# Altium PCB PCB1-B-EVT2.PcbDoc (part 2 of 2)
Units mil, origin at the board's own origin, x right, y up, seen from the top; angles counter-clockwise.
Board outline 2476 x 3729 mil, 2 copper layers (Top Layer, Bottom Layer); 100 components, 79 nets, 360 pads, 170 vias.
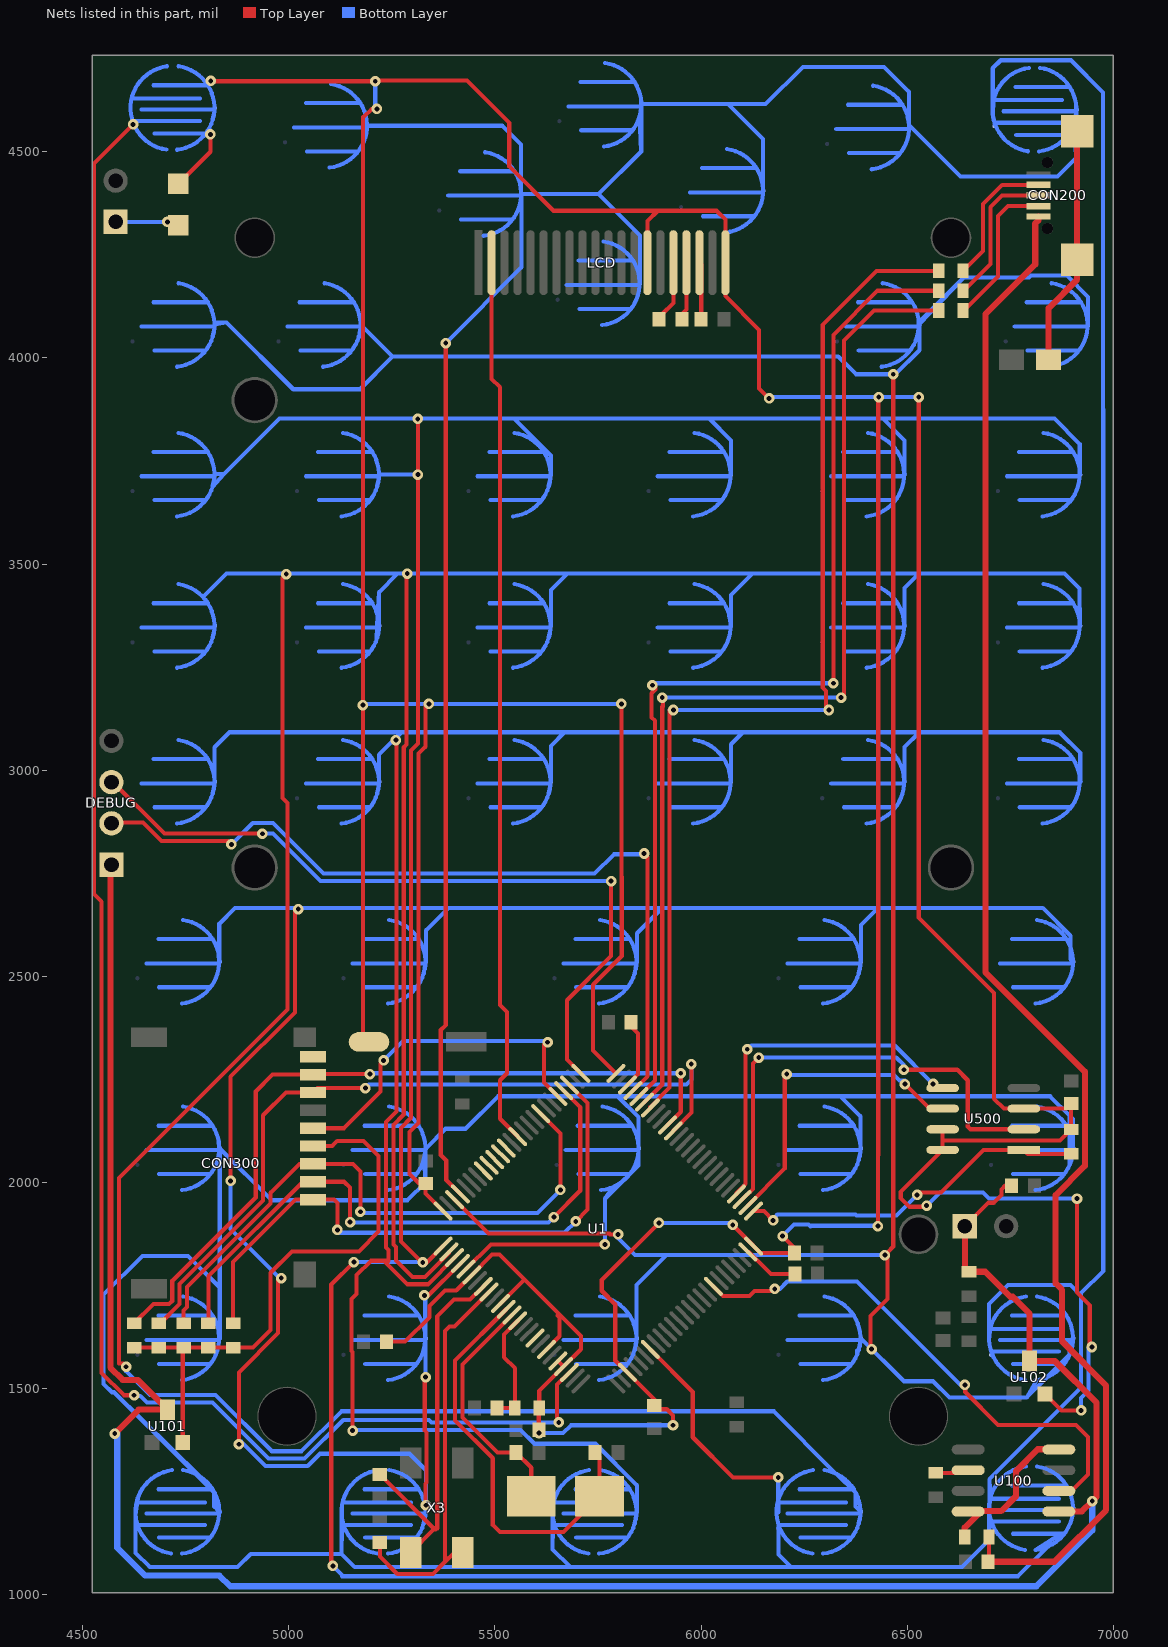
[diagram p2: the nets of this part, all layers, seen from the top]

## Via types
v1: diameter 25.59, hole 11.81, Top Layer to Bottom Layer, tented both sides, 168 vias
v2: diameter 39.37, hole 39.37, Top Layer to Bottom Layer, tented both sides, 2 vias

## Nets (pads, with @x,y where several pads share a name; then routed paths per layer and width w, separated by ;. In a path a pad name is that pad's centre, name@x,y a point inside that pad or via, vN(x,y) a via of type N, cw(c..) or ccw(c..) an arc to the next point about the centre after c; other vN are vias at no path point) (continued)
KI_6: KEY7.2 KEY14.2 KEY21.2 KEY28.2 KEY35.2 KEY42.2 KEY49.2 U1.32 | length 8170.6
  Top Layer w10: U1.32@5876.97,1595 5980,1491.97 5980,1382 6077.4,1284.6 v1(6187.4,1284.6)
  Bottom Layer w10: 4627.99,1199.98 4628.11,1160.99 4628.28,1101.72 ; 4628.28,1208.56 4628.28,1193.17 ; 4633.7,1234.55 4628.28,1193.17 ; 5128.11,1195.95 5128.11,1098.89 ; 5128.83,1213.92 5128.67,1189.08 5128.49,1161.03 5128.11,1098.89 ; 5639.86,1197.11 5639.86,1161 5639.86,1110.14 ; 5640.93,1216.11 5640.64,1187.68 5640.37,1161.04 5639.86,1110.14 ; 6187.4,1200.17 6187.4,1229.9 v1(6187.4,1284.6) 6187.71,1230.92 ; 6187.71,1170.81 6187.71,1097.29 6218,1067 ; 6698.91,1207.9 6698.91,1170 6698.91,1132.91 ; 6698.9,1623.75 6698.91,1623.8 6698.91,1704.91 6745,1751 6896,1751 6922,1725 ; 6702,1234.89 6699.3,1280.3 ; 6709.42,4625.29 6707.53,4589.9 ; 4628.28,1101.72 4663,1067 4876,1067 4907.89,1098.89 5128.11,1098.89 ; 4628.28,1101.72 4628.28,1193.17 ; 5128.11,1098.89 5160,1067 5683,1067 ; 5639.86,1110.14 5683,1067 ; 5683,1067 6218,1067 ; 6218,1067 6633,1067 6698.91,1132.91 ; 6698.91,1132.91 6699.08,1170.02 6699.22,1201.61 6699.3,1219.06 6699.3,1280.3 ; 6699.3,1280.3 6922,1503 6922,1725 ; 6707.53,4589.9 6707.53,4614.55 ; 6707.53,4589.9 6707.53,4614.55 ; 6707.53,4614.55 6707.53,4702.53 6727,4722 6897,4722 6975.06,4643.94 6975.06,4065.03 6975,4064.98 6975,3876 6975.8,3875.2 6975.8,1785.32 6922,1731.52 6922,1725
KO_0: KEY1.1 KEY2.1 KEY3.1 KEY4.1 KEY5.1 KEY6.1 KEY7.1 U1.97 | length 6242.9
  Top Layer w10: v1(5381,4036) 5381,2382.22 5368.79,2370.01 5368.79,2066.38 5382,2053.17 5382,2006.45 U1.97@5416.24,1972.21
  Bottom Layer w10: KEY1.1@5191.02,4562.99 5518.01,4562.99 5563.58,4517.42 ; v1(5381,4036) 5565.04,4220.04 KEY2.1@5565.04,4397.64 5751.64,4397.64 ; 5563.58,4403.64 5563.58,4517.42 ; KEY2.1@5563.74,4399.21 5563.58,4517.42 ; 5850.78,4584.96 5855.08,4501.08 ; KEY4.1@5852.44,4181.1 5852.44,4296.84 5751.64,4397.64 ; 6150,4397.01 6150.02,4405.52 6150.05,4413.73 6150.37,4530.63 ; KEY5.1@6150.37,4405.51 KEY5.1@6150.37,4405.79 ; KEY6.1@6504.69,4560.35 6504.68,4564.91 ; 6906.16,4574.03 6910.02,4485.02 ; 6910.02,4608.63 6910.02,4596.36 ; KEY7.1@6910.2,4603.66 6910.17,4602.39 6910.02,4596.36 ; 5751.64,4397.64 5855.08,4501.08 ; 5855.08,4501.08 KEY3.1@5855.08,4613.15 ; 5855.08,4501.08 KEY3.1@5855.08,4613.15 ; 5855.08,4501.08 KEY3.1@5855.08,4613.16 ; KEY3.1@5855.08,4613.15 KEY3.1@5855.08,4615.47 ; KEY3.1@5855.08,4613.16 KEY3.1@5855.08,4615.45 ; KEY3.1@5855.08,4615.47 6065.53,4615.47 ; 6065.53,4615.47 6150.37,4530.63 ; 6065.53,4615.47 6156.47,4615.47 6247,4706 6444,4706 6504.53,4645.47 ; KEY5.1@6150.37,4405.79 6150.37,4530.63 ; KEY5.1@6150.37,4405.79 6150.37,4530.63 ; 6504.53,4645.47 6504.68,4564.91 ; 6504.53,4645.47 6504.53,4565.06 6504.68,4564.91 ; 6504.68,4564.91 6508.26,4561.33 6629.58,4440 6865,4440 6910.02,4485.02 ; 6910.02,4485.02 6910.02,4596.36
KO_1: KEY8.1 KEY9.1 KEY10.1 KEY11.1 KEY12.1 KEY13.1 KEY14.1 U1.98 | length 7344.3
  Top Layer w10: U1.98@5402.32,1958.29 5484.82,1875.8 5777.68,1875.8 5779.48,1874 v1(5799,1874) ; v1@6411,1595 6411,1676.48 6452,1717.48 v1@6452,1830 ; v1(6446,1824) v1@6452,1830 ; v1(6466.33,3960.53) v1@6466.33,3955.33 ; v1@6471.53,3960.53 v1@6466.33,3955.33 ; v1@6452,1830 6466.33,1844.33 v1@6466.33,3955.33
  Bottom Layer w10: 4819.54,4086 4849,4086 ; KEY8.1@4819.71,4081.29 4820.76,4081.46 4849,4086 ; 5172.1,4060.6 5173.1,4066.7 KEY9.1@5175.28,4080 ; KEY9.1@5173.98,4081.29 KEY9.1@5175.28,4080 ; v1(5799,1874) 5799,1865 5840,1824 5916,1824 ; KEY12.1@5843.21,1623.3 5843.21,1718.79 5843.21,1751.21 5916,1824 ; 6378.4,1582.17 6378.4,1592 ; 6386.06,1611.56 KEY13.1@6387.9,1622 ; KEY13.1@6386.6,1620.7 KEY13.1@6387.9,1622 ; v1(6446,1824) 5916,1824 ; 6528.15,4086 6637.15,4195 ; KEY10.1@6528.31,4081.29 6637.15,4195 ; KEY10.1@6529.61,4080 6529.61,4018.61 6471.53,3960.53 v1(6466.33,3960.53) 6375.64,3960.53 6332.91,4003.25 5252.02,4003.25 ; 6814.6,1521 6789.93,1478 ; 6840,1528.07 6789.93,1478 ; 6895,1584.18 6894.77,1592 6894.1,1615.09 ; KEY14.1@6902.31,1623.29 6894.1,1615.09 ; KEY11.1@6939.06,4080 6939.06,4147.94 6887.49,4199.51 6799.97,4199.51 6795.47,4195 6637.15,4195 ; 4849,4086 5011,3924 5172.77,3924 5252.02,4003.25 ; KEY9.1@5175.28,4080 5252.02,4003.25 ; KEY13.1@6387.9,1622 6491.98,1517.92 6562.71,1517.92 6602.63,1478 6789.93,1478 ; 6789.93,1478 6894.1,1582.17 6894.1,1615.09
  other v1: 6413.9,1596
KO_2: KEY15.1 KEY16.1 KEY17.1 KEY18.1 KEY19.1 KEY20.1 KEY21.1 U1.1 | length 7864
  Top Layer w10: v1@5103.2,1070 5103.2,1752.2 v1(5158,1807) ; v1(5313,3852) v1@5313.39,3851.61 ; v1@5313.39,3853 v1@5313.39,3851.61 ; v1@5322.97,1805.97 5272,1856.93 5272,2132 5297,2157 5297,3048.06 5313.39,3064.45 v1(5313.39,3717) v1@5313.39,3851.61 ; v1@5324,1807 v1(5325,1806) ; v1@5329.97,1801.03 U1.1@5374.48,1845.55
  Bottom Layer w10: 4815.01,3686.5 4843.29,3718.29 ; KEY15.1@4819.71,3718.29 4821,3718.29 4843.29,3718.29 ; v1(5107,1070) 5129,1048 5129,1045 6768.93,1045 6840,1116.07 ; v1(5158,1807) v1@5318,1807 ; KEY16.1@5220,3717 v1(5313.39,3717) ; v1(5325,1806) 5325,1803.93 v1@5328.93,1800 ; KEY17.1@5636,3717 5636,3763 5546,3853 ; KEY18.1@6073,3717 6073,3800 6020,3853 ; KEY19.1@6494,3717 6494,3800 6441,3853 ; 6811.64,1108.62 6868.93,1145 ; 6918.54,3723 6918.54,3791.46 ; KEY20.1@6918.63,3721.13 6918.54,3791.46 ; 4843.29,3718.29 4978,3853 5546,3853 ; 5546,3853 6020,3853 ; 6020,3853 6441,3853 ; 6441,3853 6857,3853 6918.54,3791.46
KO_3: KEY22.1 KEY23.1 KEY24.1 KEY25.1 KEY26.1 KEY27.1 KEY28.1 U1.2 | length 9245.5
  Top Layer w10: v1(4605.42,1553.15) 4597.57,1561 4588,1561 4588,2011 4997,2420 4997,2920.52 4985,2932.52 4985,3466.59 v1@4996.2,3477.8 ; v1(5287.59,3477) 5285.8,3475.2 5285.8,3062.32 5279,3055.52 5279,2164.46 5254,2139.46 5254,1849.48 5260,1843.48 5260,1811 5300,1771 5330.16,1771 5388.4,1829.24 U1.2@5388.4,1831.63
  Bottom Layer w10: v1@4601,1548.73 v1(4605.42,1553.15) ; v1@4606,1541.54 4663.27,1484.27 4822.73,1484.27 4958.78,1348.22 5031.21,1348.22 5127.99,1445 6177.23,1445 6324.81,1294.99 ; 4793.46,3418.51 4793.46,3421.46 4849,3477 ; v1@4996.2,3477.8 v1@4995.41,3477 ; 5213,3316.45 5214.63,3350.26 5215.79,3374.39 5218.54,3431.54 ; 5218.54,3356 5218.54,3431.54 ; KEY24.1@5636,3350 5636,3437 5676,3477 ; KEY25.1@6073,3350 6073,3425 6125,3477 ; 6329.31,1292.92 6374.4,1247.83 6374.4,1214.5 6381.9,1207 ; KEY26.1@6494,3350 6494,3442 6529,3477 ; KEY27.1@6918.71,3350.81 6918.47,3440.53 ; 4849,3477 v1(4994,3475.59) v1@4995.41,3477 ; 4849,3477 v1@4995.41,3477 ; v1@4995.41,3477 5264,3477 ; 5218.54,3431.54 5264,3477 ; 5264,3477 v1(5287.59,3477) 5676,3477 ; 5676,3477 6125,3477 ; 6125,3477 6529,3477 ; 6529,3477 6882,3477 6918.47,3440.53 ; 6918.47,3440.53 6918.47,3357.12 6918.47,3440.53
KO_4: KEY29.1 KEY30.1 KEY31.1 KEY32.1 KEY33.1 KEY34.1 KEY35.1 U1.3 | length 5779.9
  Top Layer w10: v1(5155,1398) 5155,1588.59 5152.69,1590.9 5152.69,1717.21 5164.8,1729.32 5164.8,1775.28 5199.52,1810 5242,1810 5242,1836.02 5236,1842.02 5236,2146.91 5261,2171.91 5261,3074 v1(5260,3073) ; 5231,1810 5288,1753 5337.61,1753 U1.3@5402.32,1817.71
  Bottom Layer w10: 4818.32,2955.32 4819.59,2972.11 KEY29.1@4819.7,2973.59 ; KEY29.1@4819.7,2970.71 KEY29.1@4819.7,2972 ; KEY29.1@4819.7,2973.56 4819.7,3055.7 ; v1(5155,1398) 5157,1400 5562.52,1400 5596.32,1366.2 5743.8,1366.2 5844.5,1265.5 KEY35.1@5844.5,1201 ; 5218.54,2978 5218.54,3037.54 ; KEY30.1@5218.71,2973.3 5218.54,3037.54 ; KEY31.1@5636,2972 5636,3059 5669,3092 ; KEY32.1@6073,2972 6073,3063 6102,3092 ; KEY33.1@6494,2972 6494,3056 6530,3092 ; KEY34.1@6920,2972 6920,3042 6870,3092 6530,3092 ; KEY29.1@4819.7,2972 KEY29.1@4819.7,2973.59 ; KEY29.1@4819.71,2972 KEY29.1@4819.7,2973.59 ; KEY29.1@4819.7,2973.59 4819.7,3055.7 ; 4819.7,3055.7 4856,3092 5273,3092 ; 5218.54,3037.54 5273,3092 ; 5273,3092 5669,3092 ; 5669,3092 6102,3092 ; 6102,3092 6530,3092
KO_5: KEY36.1 KEY37.1 KEY38.1 KEY39.1 KEY40.1 KEY41.1 KEY42.1 U1.4 | length 5462.2
  Top Layer w10: v1(4859,2004) 4859,2256.54 5015,2412.54 5015,2661 5017,2663 v1(5023,2663) ; v1(4879,1365) 4879,1539.54 4974,1634.54 4974,1765 4977,1768 v1(4982,1768) ; v1(5329,1726) 5331,1724 5336.45,1724 U1.4@5416.24,1803.79 ; v1(5332,1528) 5330,1526 5330,1398 5334.6,1393.4 5334.6,1271.88 5332,1269.28 5332,1218 v1(5333,1217)
  Bottom Layer w10: KEY36.1@4831.41,2536.7 4831.41,2627.41 4870,2666 v1@5020,2666 ; v1(4859,2004) 4859,1887 4978,1768 v1(4982,1768) ; v1(4879,1365) 4885,1371 4885.09,1371 4943.87,1312.22 5046.12,1312.22 5075.9,1342 5293,1342 5333,1302 v1(5333,1217) ; v1@5020,2663 v1(5023,2663) ; v1@5023,2666 5387,2666 ; 5327.64,1594.64 5328.94,1599.81 5332,1611.97 ; v1@5331,1724 5331,1631.3 ; 5331.24,1628 5331.15,1622.03 5331,1612.97 ; v1(5332,1528) 5332,1611.97 ; KEY37.1@5332.7,2535.4 5332.7,2611.7 5387,2666 ; KEY38.1@5844.5,2535.4 5844.5,2604.5 5906,2666 ; KEY39.1@6387.9,2535.4 6387.9,2624.9 6429,2666 ; 6896.6,2541.4 6896.6,2569.22 6896.6,2598.4 6829,2666 6429,2666 ; 5331,1612.97 KEY41.1@5331,1622 ; 5331,1612.97 KEY41.1@5331,1622 ; 5331,1612.97 5332,1611.97 ; 5331,1612.97 5332,1611.97 ; KEY41.1@5331,1622 5331,1631.31 ; KEY41.1@5331,1622 5331,1631.3 ; 5387,2666 5906,2666 ; 5906,2666 6429,2666
KO_6: KEY43.1 KEY44.1 KEY45.1 KEY46.1 KEY47.1 KEY48.1 KEY49.1 U1.5 | length 5804.7
  Top Layer w10: U1.5@5430.16,1789.87 5490.29,1850 v1(5767,1850)
  Bottom Layer w10: 4813.67,1258.67 4784.87,1286.83 4575.83,1491.2 ; 4830.71,2070.91 4832.7,2071.97 ; 4831,1191.97 4828.74,1199.87 4826.7,1207 ; 4831,2073.67 4832.7,2071.97 ; KEY49.1@4832.7,1201 4831.41,1202.29 4826.7,1207 ; KEY48.1@4832.7,1622 4832.7,1745.3 ; KEY43.1@4832.7,2082.7 4958.4,1957 5288,1957 5331.41,2000.41 ; 5327.64,2055.34 5331.41,2000.41 ; KEY44.1@5331.41,2084 KEY44.1@5331.41,2082.7 ; KEY44.1@5332.7,2082.7 5380.32,2130.32 5428.58,2130.32 5507.26,2209 5798,2209 ; v1(5767,1850) 5767,1960.05 ; 5787.35,1989.19 5767,1960.05 ; 5808.78,2001.83 5819.18,2012.23 ; 5825.26,2017.72 5808.77,2001.82 5767,1960.05 ; 5827.58,2020.63 5819.18,2012.23 ; 5847,2064.21 5848.47,2041.52 ; 5848.47,2075.75 5848.47,2041.52 ; KEY45.1@5848.71,2081.69 KEY45.1@5848.71,2084.01 ; 6386.44,2088.7 6386.44,2160.56 ; KEY46.1@6386.61,2084 6386.44,2160.56 ; 6894.5,2043.65 6894.5,2052.7 6894.5,2088.7 6894.5,2122.02 6894.5,2161.5 ; 6902.14,2076.97 6902.14,2088.7 ; 4575.83,1491.2 4571.32,1491.2 4551,1511.52 4551,1728 4645,1822 4756,1822 4832.7,1745.3 ; 4575.83,1491.2 4774.11,1292.92 4819.2,1247.83 4819.2,1214.5 4826.7,1207 ; 4832.7,1745.3 4832.7,2071.97 ; 5331.41,2000.41 KEY44.1@5331.41,2081.67 ; 5331.41,2000.41 KEY44.1@5331.41,2082.69 ; 5331.41,2000.41 KEY44.1@5331.41,2081.67 ; KEY44.1@5331.41,2081.67 KEY44.1@5331.41,2082.7 ; 5767,1960.05 5819.18,2012.23 ; 5798,2209 5848.71,2158.29 ; 5798,2209 6338,2209 ; 5819.18,2012.23 5848.47,2041.52 ; KEY45.1@5848.71,2084.01 5848.71,2158.29 ; KEY45.1@5848.71,2084.01 5848.71,2158.29 ; 6338,2209 6847,2209 6894.5,2161.5 ; 6338,2209 6386.44,2160.56 ; 6894.5,2161.5 6902.14,2153.86 ; 6902.14,2088.7 6902.14,2153.86 ; 6902.14,2088.7 6902.14,2153.86
LCD_RST: LCD.2 U1.87 | length 2159.9
  Top Layer w10: LCD.2@5492.05,4231 5492.05,3949.16 5512.2,3929 5512.2,2430.63 5529.21,2413.62 5529.21,2265 5512.2,2247.99 5512.2,2154.64 U1.87@5555.43,2111.41
NetAAA_1: AAA.1 DA.A | length 126
  Bottom Layer w10: AAA.1@4580,4330 v1(4706,4330)
NetC12_1: C12.1 U1.49 | length 136.1
  Top Layer w10: U1.49@6113.6,1831.63 6115.98,1831.63 6169.61,1778 C12.1@6227.44,1778
NetC13_1: C13.1 U1.73 | length 170.2
  Top Layer w10: U1.73@5821.29,2236.68 5847.47,2262.86 5847.47,2361.53 5830.56,2378.44 C13.1@5830.56,2389
NetC400_2: C400.2 LCD.18 | length 138.8
  Top Layer w10: LCD.18@5995.98,4231 6000.44,4226.54 C400.2@6000.44,4094
NetC401_1: C401.1 LCD.16 | length 151.3
  Top Layer w10: C401.1@5898.44,4094 5906,4101.56 5906,4106 5932.99,4132.99 LCD.16@5932.99,4231
NetC401_2: C401.2 LCD.17 | length 141.5
  Top Layer w10: C401.2@5953.56,4094 5953.56,4106.56 5964.49,4117.49 LCD.17@5964.49,4231
NetCON200_2: CON200.2 R200.2 | length 373.9
  Top Layer w10: R200.2@6635.53,4115 6637.41,4115 6720,4197.59 6720,4344 6744.41,4368.41 CON200.2@6818.68,4368.41
NetCON200_3: CON200.3 R201.2 | length 359.6
  Top Layer w10: R201.2@6635.53,4163 6637.41,4163 6702,4227.59 6702,4365.54 6730.46,4394 CON200.3@6818.68,4394
NetCON200_4: CON200.4 R202.2 | length 336.1
  Top Layer w10: R202.2@6635.53,4211 6684,4259.47 6684,4373 6730.59,4419.59 CON200.4@6818.68,4419.59
NetCON200_8: CON200.8 CON200.9 L200.1 | length 582.2
  Top Layer w15: L200.1@6843,3996 6843,4121 6912.19,4190.19 CON200.8@6912.19,4238.49 CON200.9@6912.19,4549.51
NetR102_1: R102.1 U100.4 U100.8 | length 397.7
  Top Layer w15: R102.1@6639.47,1140 6639.47,1162.47 6680,1203 6728,1203 6764,1239 6764,1300 6817,1353 6868,1353 U100.8@6900,1353
NetR103_2: R103.2 U100.2 | length 114.1
  Top Layer w10: R103.2@6569,1295.53 6672.53,1295.53 U100.2@6680,1303
OSC32_IN: C17.1 U1.8 X3.4 | length 1457.4
  Top Layer w10: C17.1@5221,1291.56 5351.23,1161.33 ; X3.4@5296.01,1102.73 5351.23,1157.96 5356.17,1157.96 ; U1.8@5471.91,1748.11 5440.04,1716.24 5400.79,1716.24 5361,1676.45 ; 5351.23,1161.33 5359.54,1161.33 ; 5351.23,1161.33 5351.7,1160.86 5359.54,1160.86 5359.54,1161.33 ; 5359.54,1161.33 5359.54,1674.99 5361,1676.45 ; 5359.54,1161.33 5361,1161.33 5361,1676.45
OSC32_OUT: C18.1 U1.9 X3.1 | length 979.3
  Top Layer w10: C18.1@5221,1126.44 5221,1093 5263.26,1050.74 5349.74,1050.74 5379,1080 ; X3.1@5421.99,1102.73 5401.73,1102.73 5379,1080 ; U1.9@5485.84,1734.19 5402.37,1650.72 5389.72,1650.72 5379,1640 5379,1080
OSC_IN: C15.1 U1.12 X1.2 | length 1024.6
  Top Layer w10: U1.12@5527.59,1692.43 5403.69,1568.53 5403.69,1422.44 5495,1331.14 5495,1169 5512,1152 5666.68,1152 X1.2@5753.68,1239 5753.68,1334.76 C15.1@5743.44,1345
OSC_OUT: C16.1 U1.13 X1.1 | length 584.4
  Top Layer w10: U1.13@5541.51,1678.51 5421.69,1558.69 5421.69,1429.9 5506.59,1345 C16.1@5551.44,1345 5588.32,1308.12 X1.1@5588.32,1239
PB6: U1.92
PB7: U1.93
PH_ENABLE: U1.17
RST: C14.2 R1.1 U1.14 | length 279.3
  Top Layer w10: C14.2@5505.56,1453 R1.1@5548.47,1453 5548.47,1549.53 5522,1576 5522,1631.16 U1.14@5555.43,1664.59
SD-DET#: CON300.9
SDIO_CK: CON300.5 U1.80 | length 845.7
  Top Layer w10: CON300.5@5058.82,2131.65 5133.65,2131.65 5223,2221 5223,2289 v1(5230,2296) ; v1@5623,2343 v1@5626,2340 ; v1(5628,2340) v1@5626,2340 ; U1.80@5652.87,2208.84 5619.21,2242.5 5619.21,2333.21 v1@5626,2340
  Bottom Layer w10: v1(5230,2296) 5277,2343 v1@5623,2343
SDIO_CMD: CON300.3 R301.1 U1.83 | length 1470.7
  Top Layer w10: R301.1@4745,1658.53 4745,1689.48 4753.49,1697.96 4753.49,1746.58 4956,1949.09 4956,1975 5026.03,2045.03 CON300.3@5058.82,2045.03 5155.97,2045.03 5174,2027 v1(5174,1929) ; U1.83@5611.11,2167.09 5659,2119.2 v1(5659,1982)
  Bottom Layer w10: v1(5174,1929) 5177,1926 5603,1926 v1(5659,1982)
SDIO_D0: CON300.7 R300.1 U1.65 | length 1904.8
  Top Layer w10: R300.1@4685,1658.53 4688.6,1658.53 4735.49,1705.42 4735.49,1754.03 4938,1956.54 4938,2163 4993.26,2218.26 CON300.7@5058.82,2218.26 5069.56,2229 v1(5186,2229) ; U1.65@5932.65,2125.33 5976.8,2169.47 5976.8,2286.71 v1(5976.2,2287.3)
  Bottom Layer w10: v1(5186,2229) 5194.2,2237.2 5964.48,2237.2 5976.8,2249.52 v1@5976.8,2286.71 ; v1(5976.2,2287.3) v1@5977,2288.09
SDIO_D1: CON300.8 R304.1 U1.66 | length 1895.4
  Top Layer w10: R304.1@4625,1658.53 4671.73,1705.26 4709.87,1705.26 4717.49,1712.88 4717.49,1761.49 4920,1964 4920,2221 4960.57,2261.57 CON300.8@5058.82,2261.57 5060.25,2263 v1(5197,2263) ; U1.66@5918.73,2139.25 5951,2171.52 v1(5951,2265)
  Bottom Layer w10: v1(5197,2263) 5199,2265 v1(5951,2265)
SDIO_D2: CON300.1 R303.1 U1.78 | length 1495.7
  Top Layer w10: R303.1@4865,1658.53 4865,1807.18 5016.24,1958.42 CON300.1@5058.82,1958.42 5109.42,1958.42 5118,1949.83 v1(5118,1885) ; U1.78@5680.71,2236.68 5725,2192.39 5725,1934.41 v1(5696.3,1905.7) ; v1(5696.3,1905.7) 5693,1909 v1(5696.3,1905.7)
  Bottom Layer w10: v1(5118,1885) 5124.8,1878.2 5668.8,1878.2 v1(5696.3,1905.7)
SDIO_D3: CON300.2 R302.1 U1.79 | length 1491.7
  Top Layer w10: R302.1@4805,1658.53 4805,1772.63 5034.09,2001.72 CON300.2@5058.82,2001.72 5134.28,2001.72 5148.2,1987.8 5148.2,1917.52 5149,1916.72 v1(5149,1904) ; v1(5643,1916) 5707,1980 5707,2182.55 U1.79@5666.79,2222.76
  Bottom Layer w10: v1(5149,1904) 5149.8,1903.2 5630.2,1903.2 v1(5643,1916)
SPI2_MISO: U1.53 U500.2 | length 1148.5
  Top Layer w10: U1.53@6099.68,1958.29 6125.86,1984.47 6125.86,2288.86 v1(6140,2303) ; v1(6492.13,2273.39) 6621.61,2273.39 6647,2248 6647,2136 6654,2129 U500.2@6783,2129
  Bottom Layer w10: v1(6140,2303) 6473.54,2303 6492.13,2284.42 v1(6492.13,2273.39)
SPI2_MOSI: U1.54 U500.5 | length 854.9
  Top Layer w10: U1.54@6085.76,1972.21 6085.76,1974.71 6107.86,1996.8 6107.86,2318.86 v1(6112,2323)
  Bottom Layer w10: v1(6112,2323) 6113,2323 6122,2332 6470,2332 v1(6563,2239)
SPI2_NSS: R500.1 U1.51 U500.1 | length 859.2
  Top Layer w10: U1.51@6127.52,1930.45 6152.55,1930.45 v1(6175,1908) ; v1(6524,1970) 6524,1976 6582,1976 6685,2079 U500.1@6783,2079 6792.53,2069.47 R500.1@6897.85,2069.47
  Bottom Layer w10: v1@6174,1911 6185,1922 6375.06,1922 6376.86,1920.2 6474.2,1920.2 v1(6524,1970)
SPI2_SCK: U1.52 U500.6 | length 775.1
  Top Layer w10: U1.52@6113.6,1944.37 6203,2033.77 v1@6203,2258 ; v1(6494.4,2238.6) 6554,2179 U500.6@6586.15,2179
  Bottom Layer w10: v1@6203,2258 v1(6208,2263) ; v1@6208,2261 6468.04,2261 6481.44,2247.6 6494.4,2247.6 v1(6494.4,2238.6)
SPI3_MISO: U1.90
SPI3_MOSI: U1.91
SPI3_SCK: U1.89
STDBY: U1.43 U100.6 | length 1244.4
  Top Layer w10: U1.43@6030.09,1748.11 6053.2,1725 6118,1725 6130,1737 6176,1737 6179,1740 v1(6179,1742) ; v1@6641,1508 6641,1491.46 6720.46,1412 6910,1412 6939,1383 6939,1292 U100.6@6900,1253
  Bottom Layer w10: v1(6179,1742) 6191.54,1742 6209.14,1759.6 6378.4,1759.6 6629,1509 v1(6640,1509)
SWCLK: DEBUG.3 U1.76 | length 1837.8
  Top Layer w10: DEBUG.3@4570,2971 4572,2973 4699,2846 v1(4936,2846) ; U1.76@5708.55,2264.52 5675,2298.07 5675,2442 5782,2549 v1(5782,2731)
  Bottom Layer w10: v1(4936,2846) 4962,2846 5077,2731 v1(5782,2731)
SWDIO: DEBUG.2 U1.72 | length 2008.4
  Top Layer w10: DEBUG.2@4570,2871 4572,2873 4646.54,2873 4691.54,2828 4853,2828 v1(4861,2820) ; U1.72@5835.21,2222.76 5870,2257.55 5870,2790 v1(5862,2798)
  Bottom Layer w10: v1(4861,2820) 4912.8,2871.8 4961.66,2871.8 5084.46,2749 5742,2749 5789,2796 5866,2796 5864,2798 v1(5862,2798)
USB_DM: R200.1 U1.70 | length 2560.8
  Top Layer w10: U1.70@5863.05,2194.92 5906,2237.87 5906,3153.46 5907.2,3154.66 5907.2,3156.68 5908,3157.48 v1@5908,3166.48 ; v1(6340,3176) 6346.8,3182.8 6346.8,4041.8 6420,4115 R200.1@6576.47,4115
  Bottom Layer w10: v1(5906,3176) 5902,3176 v1(6340,3176)
USB_DP: R201.1 U1.71 | length 2608.9
  Top Layer w10: U1.71@5849.13,2208.84 5888,2247.71 5888,3120.06 5880.2,3127.86 5880.2,3186.68 5889,3195.48 5889,3199 v1(5882,3206) ; v1(6321,3211) 6321,4056 6428,4163 R201.1@6576.47,4163
  Bottom Layer w10: v1(5882,3206) 5887,3211 v1(6321,3211)
USB_ID: R202.1 U1.69 | length 2640.4
  Top Layer w10: U1.69@5876.97,2181 5876.97,2183.39 5924,2230.42 v1@5924,3146 ; v1@6303,3149 6303,3192.52 6295.2,3200.32 6295.2,4080.2 6426,4211 R202.1@6576.47,4211
  Bottom Layer w10: v1@5924,3146 v1(6310,3146)
  other v1: 5933,3146
VBAT: BAT.1 C101.2 DEBUG.1 R105.2 U100.5 U101.3 U102.3 | length 5495.4
  Top Layer w10: BAT.1@6640,1894 6696.92,1950.92 6710.17,1950.92 6729.25,1970 6729.25,1983.25 6738,1992 C101.2@6753.44,1992
  Top Layer w15: DEBUG.1@4570,2771 4567.5,2768.5 4567.5,1551.05 4597.51,1521.04 4633.96,1521.04 U101.3@4706,1449 4636,1449 v1(4578,1391) ; BAT.1@6640,1894 6640,1793.53 R105.2@6650,1783.53 6689.47,1783.53 6750,1723 6756.17,1723 6797,1682.17 U102.3@6797,1567 6858,1567 6959.5,1465.5 6959.5,1237.5 v1(6949,1227) 6924,1202 U100.5@6868,1202
  Bottom Layer w15: v1(4578,1391) 4584,1397 4584,1114.08 4651.58,1046.5 4832,1046.5 4858.02,1020.48 6813.48,1020.48 6949,1156 v1(6949,1227)
VBUS: C100.2 CON200.1 R102.2 | length 3769.4
  Top Layer w10: C100.2@6696.56,1080 6698.53,1081.97 R102.2@6698.53,1140
  Top Layer w15: C100.2@6696.56,1080 6857,1080 6982.5,1205.5 6982.5,1507.5 6875.74,1614.26 6875.74,1739.26 6860,1755 6860,1969.13 6931.07,2040.19 6931.07,2268.73 6690,2509.8 6690,4106 6810.72,4226.72 6810.72,4326.13 6818.68,4334.09 CON200.1@6818.68,4342.82
VDD: C8.1 C9.1 C10.1 C11.1 C19.1 C500.1 DA.K KON.1 LCD.14 LCD.20 R1.2 R500.2 SW-ISP.2 U1.6 U1.11 U1.19 U1.21 U1.22 U1.28 U1.50 U1.75 U1.100 U102.2 U500.3 U500.7 U500.8 | length 16244.9
  Top Layer w10: DA.K@4732,4422 4810,4500 v1(4810,4542) ; v1@4812,4671 v1(5210,4671) ; SW-ISP.2@5180,2355.78 v1(5180,3158) 5180,4584 5181.46,4584 5201.46,4604 v1(5214,4604) ; v1@5210,4673 5432,4673 5535,4570 5535,4464 5642,4357 5895,4357 ; C19.1@5236.56,1614 5282.13,1614 5341.09,1672.96 5341.09,1700.47 5378.82,1738.21 5406.33,1738.21 U1.6@5444.08,1775.95 5493.25,1825.13 5511.55,1825.13 5572,1764.68 ; v1(5340,3161) 5333,3161 5331.39,3159.39 5331.39,3056.99 5315,3040.61 5315,2144 5293,2122 5293,2021 5316.56,1997.44 C10.1@5332,1997.44 5332,1972.93 U1.100@5374.48,1930.45 ; U1.11@5513.67,1706.35 5572,1764.68 ; C11.1@5606.56,1392.44 v1(5607,1392) ; C11.1@5606.56,1400 5606.56,1452.03 R1.2@5607.53,1453 5607.53,1493.98 U1.22@5666.79,1553.24 ; U1.19@5625.03,1595 5657,1626.97 5657,1672 5652,1677 ; U1.21@5652.87,1567.16 U1.22@5666.79,1553.24 ; U1.75@5793.45,2264.52 5738,2319.97 5738,2479.54 5807.8,2549.34 5807.8,2741.68 5807,2742.48 v1(5807,3161) ; LCD.14@5870,4231 5870,4332 5895,4357 ; v1(5898,1902) 5759.2,1763.2 5759.2,1737.32 5792,1704.52 5792,1568.61 U1.28@5821.29,1539.32 5887,1473.61 C8.1@5887,1458.56 5895.56,1450 5917,1450 5932,1435 v1(5932,1411) ; v1(6077,1897) 6127.52,1846.48 U1.50@6127.52,1845.55 6144.07,1829 C9.1@6226.44,1829 6226.44,1841.56 v1(6198,1870) ; v1(6165,3902) 6141,3926 6141,4068 6058.98,4150.02 LCD.20@6058.98,4231 6058.98,4336.02 6038,4357 5895,4357 ; v1(6429,1894) 6429,2066 6430,2066 6430,3904 v1(6431,3905) ; v1(6528,3905) 6528,2642.8 6711,2459.8 6711,2203 6735,2179 U500.3@6783,2179 6885.41,2179 C500.1@6897.85,2191.44 R500.2@6897.85,2128.53 6871.16,2101.84 6588.31,2101.84 6586.15,2104 ; v1(6547,1944) 6550,1941 6506,1941 6484.33,1962.67 6484.33,1977.18 U500.8@6586.15,2079 6586.15,2104 ; U500.7@6586.15,2129 6586.15,2104 ; U102.2@6834,1487 6874,1447 v1(6922,1447) ; v1(6912,1961) 6912,1733 6943,1702 6943,1601 v1(6948,1601) ; 5572,1764.68 5709,1627.68 5709,1595.45 U1.22@5666.79,1553.24
  Bottom Layer w10: v1(5180,3158) 5183,3161 v1(5340,3161) v1(5807,3161) ; v1(5210,4671) 5210,4608 v1(5214,4604) ; v1(5607,1392) 5607.2,1392.2 5665.68,1392.2 5684.48,1411 v1(5932,1411) ; v1(5898,1902) 6072,1902 v1(6077,1897) ; v1(6165,3902) 6168,3905 v1(6431,3905) v1(6528,3905) ; v1(6198,1870) 6225.8,1897.8 6260.68,1897.8 6265.48,1893 6267.48,1895 6428,1895 v1(6429,1894) ; v1(6547,1944) 6548,1944 6579.8,1975.8 6683.66,1975.8 6698.46,1961 v1(6912,1961) ; v1(6922,1447) 6922,1477.54 6940,1495.54 6940,1599 6942,1601 v1(6948,1601)
  other v1: 4811,4672
VPH: CON300.4 R300.2 R301.2 R302.2 R303.2 R304.2 U101.2 | length 1384.5
  Top Layer w10: R304.2@4625,1599.47 R300.2@4685,1599.47 R301.2@4745,1599.47 ; U101.2@4743,1369 4743,1597.47 R301.2@4745,1599.47 ; CON300.4@5058.82,2088.34 5105.44,2088.34 5117.61,2100.51 5181.49,2100.51 5217.8,2064.2 5217.8,1880.8 5170,1833 5008,1833 4956,1781 4956,1642 4913.47,1599.47 R303.2@4865,1599.47 R302.2@4805,1599.47 R301.2@4745,1599.47
WKUP: KON.2 U1.23 | length 4448.6
  Top Layer w10: v1(4622.71,4566.3) 4527.47,4471.06 4527.47,2699.53 4546,2681 4546,1538 4600,1484 v1(4625,1484) ; v1(5655,1418) 5651,1422 5651,1509.61 U1.23@5680.71,1539.32
  Bottom Layer w10: KON.2@4621,4566.3 v1(4622.71,4566.3) ; v1(4625,1484) 4626.88,1482.12 4639.97,1482.12 4655.82,1466.27 4815.27,1466.27 4951.32,1330.22 5038.67,1330.22 5132.24,1423.8 5340.68,1423.8 5346.48,1418 v1(5655,1418)
pads on no net: CON200.6 CON200.7 CON300.0 U1.7 U1.15 U1.16 U1.18 U1.33 U1.34 U1.36 U1.44 U1.45 U1.46 U1.47 U1.48 U1.55 U1.56 U1.57 U1.59 U1.60 U1.63 U1.64 U1.67 U1.68 U1.77 U1.84 X3.2 X3.3
copper on no net:
  other v2: 4645.43,1926.92 4645.43,2241.88

## Polygon pours and split planes (outlines as drawn)
GND on Top Layer "Top Layer-GND" (solid, remove dead copper, pour order 2): 7000,1005 4524,1005 4524,4734 7000,4734

## Silkscreen, mask and mechanical layers (free items; w line width, h text height)
Top Overlay:
  text "ArithMax Entry" at 5559,1108 h60
  text "V3/P by Wenting" at 5668,1041 h40
Mechanical 1:
  the board outline again, w5